# Altium PCB PCB2.PcbDoc
Units mm, origin at the board's own origin, x right, y up, seen from the top; angles counter-clockwise.
Board outline 100 x 100 mm, 2 copper layers (Top Layer, Bottom Layer); 9 components, 8 nets, 136 pads, 45 vias.
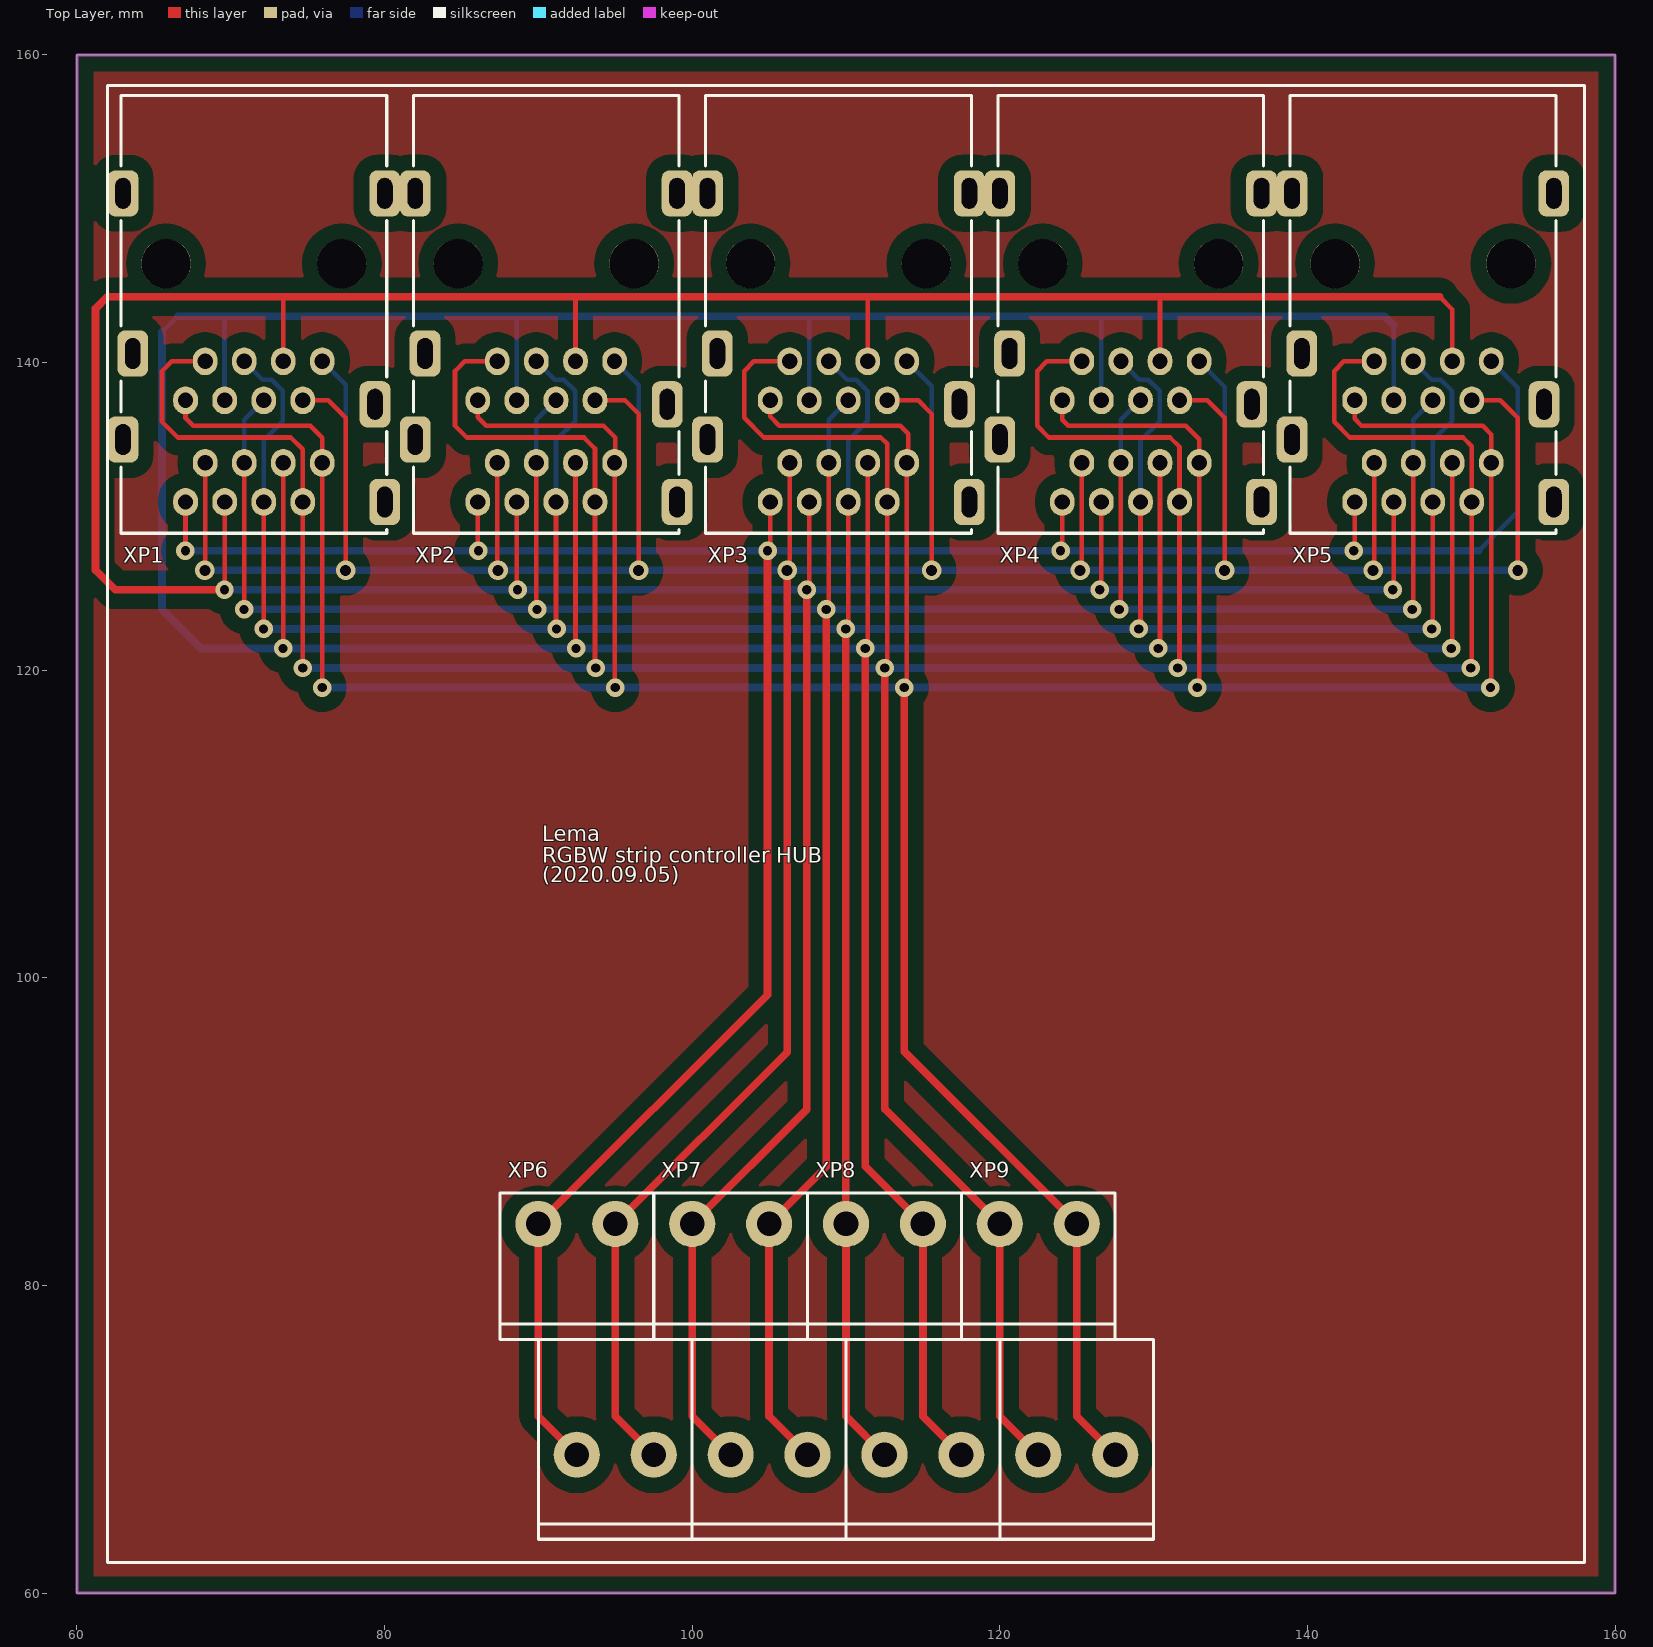
[diagram p0: Top Layer view]
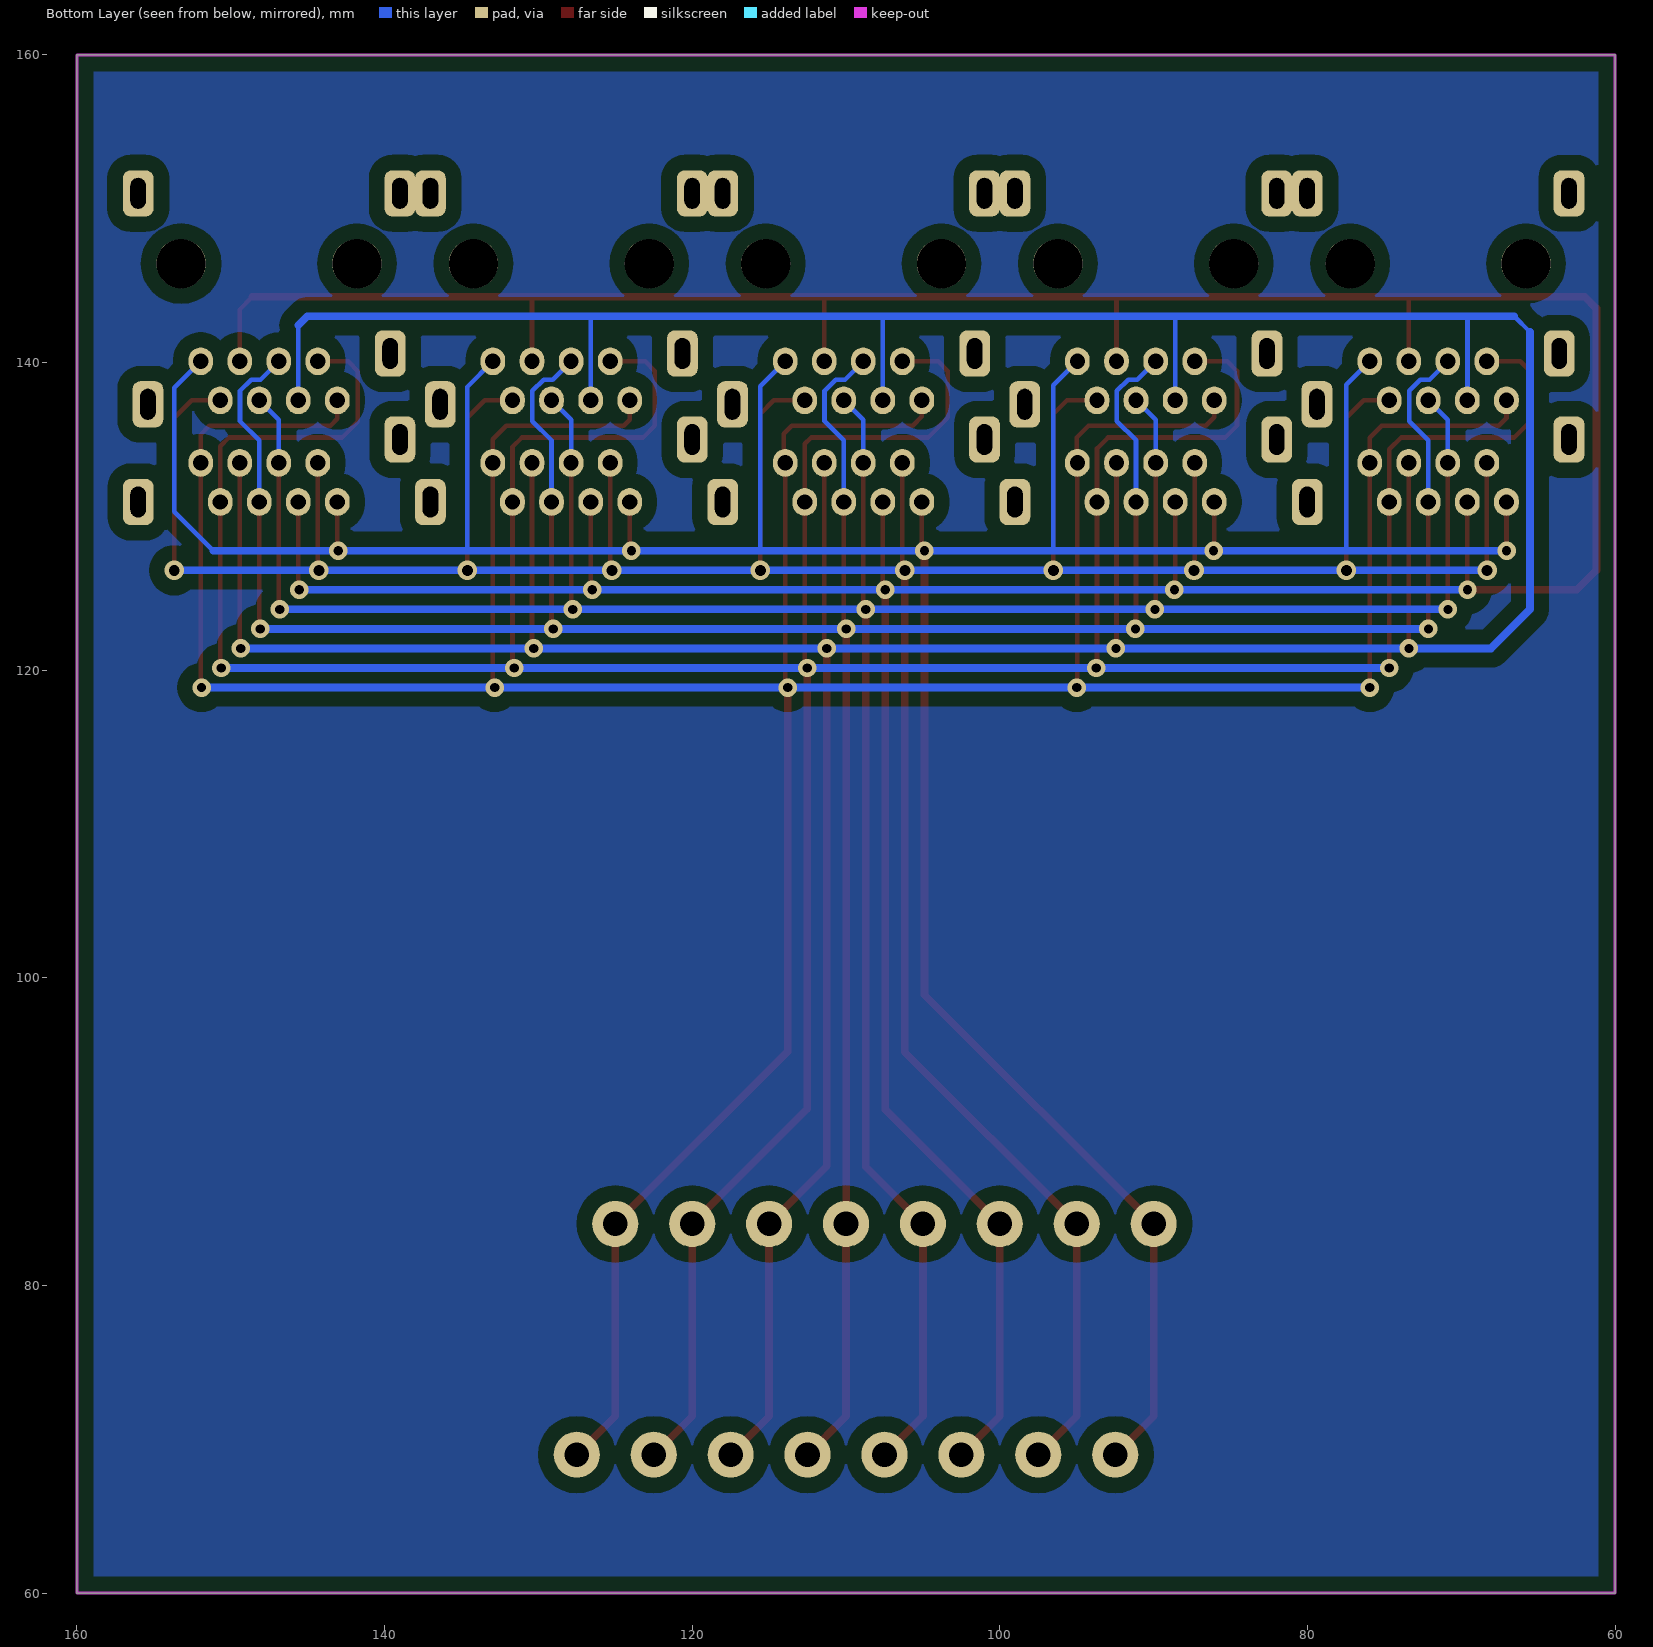
[diagram p1: Bottom Layer view, seen from below]

## Layer stack, top to bottom
Top Solder: solder mask 0.0102, Solder Resist, Dk 3.5
Top Layer: signal copper 0.0356
Dielectric 1: dielectric 0.32, FR-4, Dk 4.8
Bottom Layer: signal copper 0.0356
Bottom Solder: solder mask 0.0102, Solder Resist, Dk 3.5

## Board outline
60,60 60,160 160,160 160,60

## Design rules (kind name [scope] priority, off if disabled: settings)
Clearance Clearance_1 [All vs (InNamedPolygon('bot_gnd') OR InNamedPolygon('bot_gnd'))] p1: gap=1
Clearance [All] p2: gap=0.3
ComponentClearance [All] p1: gap=0 collisioncheckmode=3 verticalgap=0 showdistances=FALSE
HoleSize [All] p1: absolutevalues=TRUE maxlimit=11 minlimit=0.025 maxpercent=80.000 minpercent=20.000
HoleToHoleClearance [All] p1: gap=0.01 allowstackedmicrovias=TRUE
MinimumSolderMaskSliver [All] p1: minsoldermaskwidth=0.01
PolygonConnect [All] p1: connectstyle=Relief reliefconductorwidth=0.254 reliefentries=4 polygonreliefangle="90 Angle" airgapwidth=0.254
RoutingVias [All] p1: holewidth=0.6 width=11 viastyle="Through Hole" minholewidth=0.5 minwidth=1 maxholewidth=1.5 maxwidth=1.27
SilkToSilkClearance [All] p1: silktosilkclearance=0.01
SilkToSolderMaskClearance [IsPad] p1: minsilkscreentomaskgap=0.01 clearancetoexposedcopper=TRUE
SolderMaskExpansion [All] p1: expansion=0.102
UnpouredPolygon [All] p1: allowunpoured=FALSE
Width [All] p1: maxlimit=1 minlimit=0.2 preferedwidth=0.2
23 further rules are at their usual default settings.

## Components (designator, comment, footprint, x,y, rotation, side; value= is the part's Value field where it differs from the comment)
XP1 "RJ45 2V 8P8C" "RJ45 2V 8P8C" 75.954,140.078 r180 top
XP2 "RJ45 2V 8P8C" "RJ45 2V 8P8C" 94.954,140.078 r180 top
XP3 "RJ45 2V 8P8C" "RJ45 2V 8P8C" 113.954,140.078 r180 top
XP4 "RJ45 2V 8P8C" "RJ45 2V 8P8C" 132.954,140.078 r180 top
XP5 "RJ45 2V 8P8C" "RJ45 2V 8P8C" 151.954,140.078 r180 top
XP6 "KF129A 5,0 2P" "KF129A 5,0 2P" 90,84 r0 top
XP7 "KF129A 5,0 2P" "KF129A 5,0 2P" 100,84 r0 top
XP8 "KF129A 5,0 2P" "KF129A 5,0 2P" 110,84 r0 top
XP9 "KF129A 5,0 2P" "KF129A 5,0 2P" 120,84 r0 top

## Footprints (in the part's own frame and the unit in brackets; to place one, negate y for a bottom-side part, rotate by r counter-clockwise, add the part's x,y. Pads: shape width x height; smd on the part's side, far side on the other; paste and mask are expansions set on the pad)
"KF129A 5,0 2P" [mm]
  round 3 hole 1.6: 1(0,0) 2(2.5,-15) 3(5,0) 4(7.5,-15)
  silkscreen extent -2.5,-20.5 10,2
"RJ45 2V 8P8C" [mm]
  rrect50% 2x3 hole 1 slot 2 at 90 deg unplated: 0(-4.064,9.144) 0(-4.064,-10.922) 0(-3.429,2.794) 0(12.319,-0.508) 0(12.954,5.08) 0(12.954,-10.922)
  round 3.2 hole 3.2 unplated: 0(-1.27,-6.35) 0(10.16,-6.35)
  oval 1.6x1.8 hole 1: 1(0,0) 2(1.27,2.54) 3(2.54,0) 4(3.81,2.54) 5(5.08,0) 6(6.35,2.54) 7(7.62,0) 8(8.89,2.54) 11(8.89,9.144) 12(7.62,6.604) 13(6.35,9.144) 14(5.08,6.604) 15(3.81,9.144) 16(2.54,6.604) 17(1.27,9.144) 18(0,6.604)
  silkscreen extent -4.19,-17.27 13.08,11.18

## Via types
v1: diameter 1.2, hole 0.6, Top Layer to Bottom Layer, tented both sides, 35 vias
v2: diameter 1.27, hole 0.711, Top Layer to Bottom Layer, tented both sides, 10 vias

## Nets (pads, with @x,y where several pads share a name; then routed paths per layer and width w, separated by ;. In a path a pad name is that pad's centre, name@x,y a point inside that pad or via, vN(x,y) a via of type N, cw(c..) or ccw(c..) an arc to the next point about the centre after c; other vN are vias at no path point)
1: XP1.1 XP1.11 XP2.1 XP2.11 XP3.1 XP3.11 XP4.1 XP4.11 XP5.1 XP5.11 XP6.1 XP6.2 | length 232
  Top Layer w0.3: v1(67.056,127.762) 67.064,127.77 XP1.11 ; XP2.11 86.064,127.804 v1(86.106,127.762) ; v1(104.902,127.762) 105.064,127.924 XP3.11 ; v1(123.952,127.762) 124.064,127.874 XP4.11 ; v1(143.002,127.762) 143.064,127.824 XP5.11
  Top Layer w0.5: XP6.2 90,71.5 XP6.1 104.902,98.902 v1(104.902,127.762)
  Bottom Layer w0.3: XP1.1 77.47,138.562 77.47,127.762 ; XP2.1 96.52,138.512 96.52,127.762 ; XP3.1 115.57,138.462 115.57,127.762 ; XP4.1 134.62,138.412 134.62,127.762 ; 151.13,127.762 153.67,130.302 153.67,138.362 XP5.1
  Bottom Layer w0.5: v1(67.056,127.762) 77.47,127.762 v1(86.106,127.762) 96.52,127.762 v1(104.902,127.762) 115.57,127.762 v1(123.952,127.762) 134.62,127.762 v1(143.002,127.762) 151.13,127.762
2: XP1.2 XP1.12 XP2.2 XP2.12 XP3.2 XP3.12 XP4.2 XP4.12 XP5.2 XP5.12 XP6.3 XP6.4 | length 250.2
  Top Layer w0.3: v2(68.326,126.492) 68.334,126.5 XP1.12 ; XP1.2 76.33,137.538 77.47,136.398 v2(77.47,126.492) ; XP2.12 87.334,126.534 v2(87.376,126.492) ; XP2.2 95.634,137.538 96.52,136.652 v2(96.52,126.492) ; v2(106.172,126.492) 106.334,126.654 XP3.12 ; XP3.2 114.684,137.538 115.57,136.652 v2(115.57,126.492) ; v2(125.222,126.492) 125.334,126.604 XP4.12 ; XP4.2 133.48,137.538 134.62,136.398 v2(134.62,126.492) ; v2(144.272,126.492) 144.334,126.554 XP5.12 ; XP5.2 152.53,137.538 153.67,136.398 v2(153.67,126.492)
  Top Layer w0.5: XP6.4 95,71.5 XP6.3 106.172,95.172 v2(106.172,126.492)
  Bottom Layer w0.5: v2(68.326,126.492) v2(77.47,126.492) v2(87.376,126.492) v2(96.52,126.492) v2(106.172,126.492) v2(115.57,126.492) v2(125.222,126.492) v2(134.62,126.492) v2(144.272,126.492) v2(153.67,126.492)
3: XP1.3 XP1.13 XP2.3 XP2.13 XP3.3 XP3.13 XP4.3 XP4.13 XP5.3 XP5.13 XP7.1 XP7.2 | length 300.1
  Top Layer w0.3: v1(69.596,125.222) 69.604,125.23 XP1.13 ; XP1.3 73.414,144.272 ; XP2.13 88.604,125.264 v1(88.646,125.222) ; XP2.3 92.414,144.272 ; v1(107.442,125.222) 107.604,125.384 XP3.13 ; XP3.3 111.414,144.272 ; v1(126.492,125.222) 126.604,125.334 XP4.13 ; XP4.3 130.414,144.272 130.556,144.272 ; v1(145.542,125.222) 145.604,125.284 XP5.13 ; 148.59,144.272 149.414,143.448 XP5.3
  Top Layer w0.5: v1(69.596,125.222) 62.484,125.222 61.214,126.492 61.214,143.51 61.976,144.272 73.414,144.272 92.414,144.272 111.414,144.272 130.414,144.272 148.59,144.272 ; XP7.2 100,71.5 XP7.1 107.442,91.442 v1(107.442,125.222)
  Bottom Layer w0.5: v1(69.596,125.222) v1(88.646,125.222) v1(107.442,125.222) v1(126.492,125.222) v1(145.542,125.222)
4: XP1.4 XP1.14 XP2.4 XP2.14 XP3.4 XP3.14 XP4.4 XP4.14 XP5.4 XP5.14 XP7.3 XP7.4 | length 204.2
  Top Layer w0.3: v1(70.866,123.952) 70.874,123.96 XP1.14 ; XP2.14 89.874,123.994 v1(89.916,123.952) ; v1(108.712,123.952) 108.874,124.114 XP3.14 ; v1(127.762,123.952) 127.874,124.064 XP4.14 ; v1(146.812,123.952) 146.874,124.014 XP5.14
  Top Layer w0.5: XP7.4 105,71.5 XP7.3 108.712,87.712 v1(108.712,123.952)
  Bottom Layer w0.3: XP1.14 70.874,136.268 XP1.4 ; XP2.14 89.874,136.268 XP2.4 ; XP3.14 108.874,136.268 XP3.4 ; XP4.14 127.874,136.268 XP4.4 ; XP5.14 146.874,136.268 XP5.4
  Bottom Layer w0.5: v1(70.866,123.952) v1(89.916,123.952) v1(108.712,123.952) v1(127.762,123.952) v1(146.812,123.952)
5: XP1.5 XP1.15 XP2.5 XP2.15 XP3.5 XP3.15 XP4.5 XP4.15 XP5.5 XP5.15 XP8.1 XP8.2 | length 227.3
  Top Layer w0.3: v1(72.136,122.682) 72.144,122.69 XP1.15 ; XP2.15 91.144,122.724 v1(91.186,122.682) ; v1(109.982,122.682) 110.144,122.844 XP3.15 ; v1(129.032,122.682) 129.144,122.794 XP4.15 ; v1(148.082,122.682) 148.144,122.744 XP5.15
  Top Layer w0.5: XP8.1@109.982,84.018 v1(109.982,122.682) ; XP8.1 110,71.5 XP8.2
  Bottom Layer w0.3: XP1.5 72.064,138.888 72.662,138.888 73.394,138.156 73.394,136.188 72.144,134.938 XP1.15 ; XP2.5 91.064,138.888 91.662,138.888 92.394,138.156 92.394,136.188 91.144,134.938 XP2.15 ; XP3.5 110.064,138.888 110.662,138.888 111.394,138.156 111.394,136.188 110.144,134.938 XP3.15 ; XP4.5 129.064,138.888 129.662,138.888 130.394,138.156 130.394,136.188 129.144,134.938 XP4.15 ; XP5.5 148.064,138.888 148.662,138.888 149.394,138.156 149.394,136.188 148.144,134.938 XP5.15
  Bottom Layer w0.5: v1(72.136,122.682) v1(91.186,122.682) v1(109.982,122.682) v1(129.032,122.682) v1(148.082,122.682)
6: XP1.6 XP1.16 XP2.6 XP2.16 XP3.6 XP3.16 XP4.6 XP4.16 XP5.6 XP5.16 XP8.3 XP8.4 | length 326
  Top Layer w0.3: v1(73.406,121.412) 73.414,121.42 XP1.16 ; XP2.16 92.414,121.454 v1(92.456,121.412) ; v1(111.252,121.412) 111.414,121.574 XP3.16 ; v1(130.302,121.412) 130.414,121.524 XP4.16 ; v1(149.352,121.412) 149.414,121.474 XP5.16
  Top Layer w0.5: v1(111.252,121.412) 111.252,87.748 XP8.3 115,71.5 XP8.4
  Bottom Layer w0.3: 65.532,141.986 66.548,143.002 ; 69.596,143.002 69.596,137.546 XP1.6 ; XP2.6 88.604,143.002 ; XP3.6 107.604,143.002 ; XP4.6 126.604,143.002 ; XP5.6 145.604,142.432
  Bottom Layer w0.5: 65.532,141.986 65.532,123.952 68.072,121.412 v1(73.406,121.412) v1(92.456,121.412) v1(111.252,121.412) v1(130.302,121.412) v1(149.352,121.412) ; 66.548,143.002 69.596,143.002 88.604,143.002 107.604,143.002 126.604,143.002 ; 126.746,143.002 126.604,143.002 ; 145.604,142.432 145.034,143.002 126.604,143.002
7: XP1.7 XP1.17 XP2.7 XP2.17 XP3.7 XP3.17 XP4.7 XP4.17 XP5.7 XP5.17 XP9.1 XP9.2 | length 284.4
  Top Layer w0.3: XP1.7 66.164,140.078 65.532,139.446 65.532,136.144 66.548,135.128 73.914,135.128 74.684,134.358 XP1.17 74.684,120.15 v1(74.676,120.142) ; XP2.7 85.214,140.078 84.582,139.446 84.582,135.89 85.344,135.128 92.964,135.128 93.684,134.408 XP2.17 93.684,120.184 v1(93.726,120.142) ; XP3.7 104.01,140.078 103.378,139.446 103.378,136.398 104.648,135.128 112.268,135.128 112.684,134.712 XP3.17 112.684,120.304 v1(112.522,120.142) ; XP4.7 123.06,140.078 122.428,139.446 122.428,135.89 123.19,135.128 131.064,135.128 131.684,134.508 XP4.17 131.684,120.254 v1(131.572,120.142) ; XP5.7 142.364,140.078 141.732,139.446 141.732,136.144 142.748,135.128 150.114,135.128 150.684,134.558 XP5.17 150.684,120.204 v1(150.622,120.142)
  Top Layer w0.5: v1(112.522,120.142) 112.522,91.478 XP9.1 120,71.5 XP9.2
  Bottom Layer w0.5: v1(74.676,120.142) v1(93.726,120.142) v1(112.522,120.142) v1(131.572,120.142) v1(150.622,120.142)
8: XP1.8 XP1.18 XP2.8 XP2.18 XP3.8 XP3.18 XP4.8 XP4.18 XP5.8 XP5.18 XP9.3 XP9.4 | length 266.1
  Top Layer w0.3: XP1.8 67.064,136.39 67.564,135.89 75.184,135.89 75.954,135.12 XP1.18 75.954,118.88 v1(75.946,118.872) ; XP2.8 86.064,136.44 86.614,135.89 94.234,135.89 94.996,135.128 94.996,133.516 XP2.18 94.954,118.914 v1(94.996,118.872) ; XP3.8 105.064,136.49 105.664,135.89 113.538,135.89 114.046,135.382 114.046,133.566 XP3.18 113.954,119.034 v1(113.792,118.872) ; XP4.8 124.064,136.286 124.46,135.89 132.08,135.89 132.954,135.016 XP4.18 132.954,118.984 v1(132.842,118.872) ; XP5.8 143.064,136.336 143.51,135.89 151.384,135.89 151.954,135.32 XP5.18 151.954,118.934 v1(151.892,118.872)
  Top Layer w0.5: v1(113.792,118.872) 113.792,95.208 XP9.3 125,71.5 XP9.4
  Bottom Layer w0.5: v1(75.946,118.872) v1(94.996,118.872) v1(113.792,118.872) v1(132.842,118.872) v1(151.892,118.872)
pads on no net: XP1.0 XP2.0 XP3.0 XP4.0 XP5.0

## Polygon pours and split planes (outlines as drawn)
no net on Top Layer "bot_gnd" (solid, pour order 2): 60,160 160,160 160,60 60,60
no net on Bottom Layer "bot_gnd" (solid, pour order 4): 60,60 60,160 160,160 160,60

## Keep-outs
Keep-Out Layer:
  the board outline again, w0.2

## Silkscreen, mask and mechanical layers (free items; w line width, h text height)
Top Overlay:
  lines w0.2: 62,62 62,158 158,158 158,62 62,62
  text "Lema" at 90.246,108.873 h1
  text "RGBW strip controller HUB" at 90.246,107.476 h1
  text "(2020.09.05)" at 90.246,106.206 h1